# Altium PCB 主控板0415 .PcbDoc (part 3 of 3)
Units mil, origin at the board's own origin, x right, y up, seen from the top; angles counter-clockwise.
Board outline 9048 x 3931 mil, 2 copper layers (Top Layer, Bottom Layer); 421 components, 239 nets, 1182 pads, 360 vias.
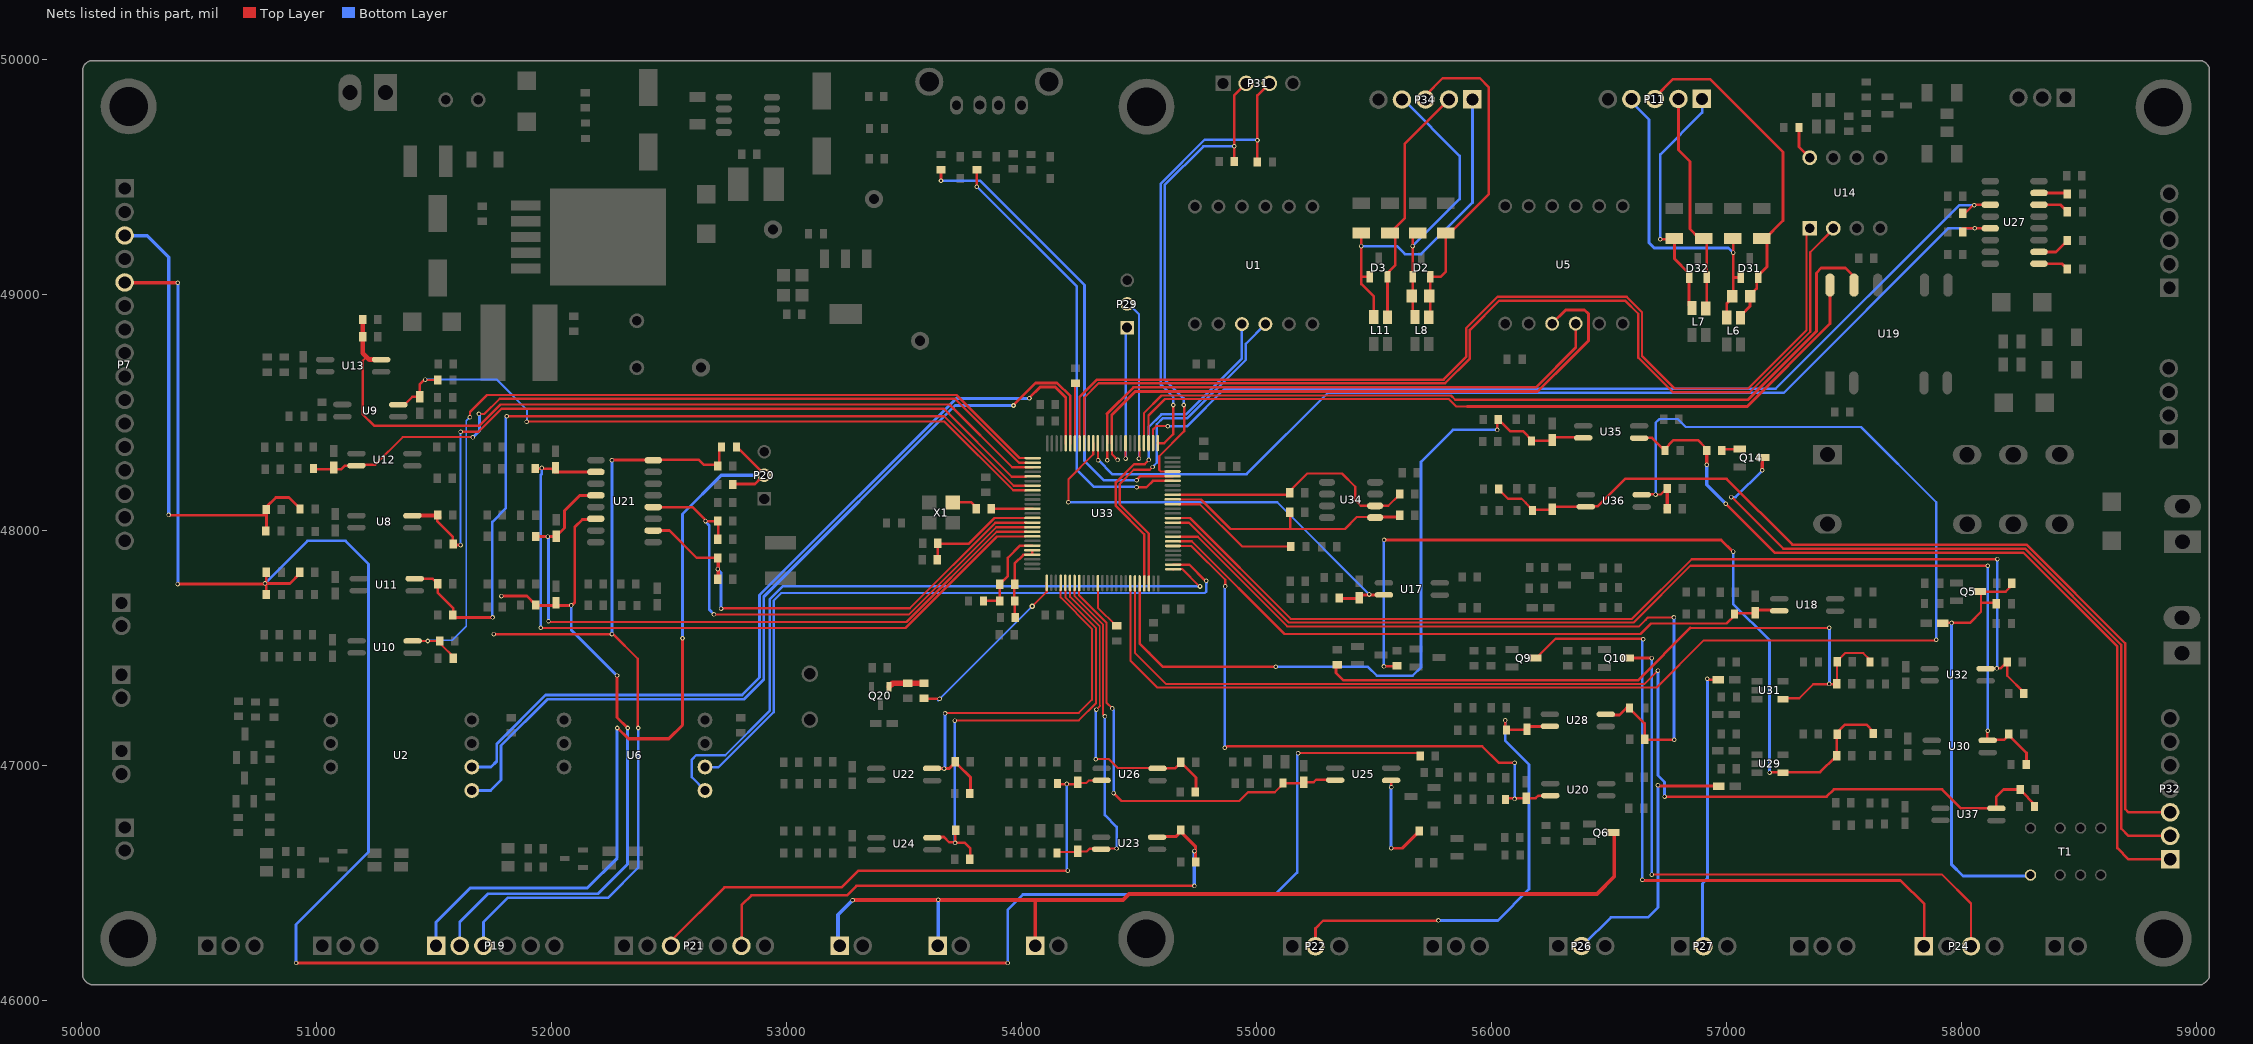
[diagram p3: the nets of this part, all layers, seen from the top]

## Via types
v1: diameter 19, hole 11.81, Top Layer to Bottom Layer, 133 vias
v2: diameter 19, hole 12, Top Layer to Bottom Layer, 130 vias
v3: diameter 20, hole 10, Top Layer to Bottom Layer, 67 vias
v4: diameter 24, hole 12, Top Layer to Bottom Layer, 29 vias
v5: diameter 40, hole 20, Top Layer to Bottom Layer, 1 vias

## Nets (pads, with @x,y where several pads share a name; then routed paths per layer and width w, separated by ;. In a path a pad name is that pad's centre, name@x,y a point inside that pad or via, vN(x,y) a via of type N, cw(c..) or ccw(c..) an arc to the next point about the centre after c; other vN are vias at no path point) (continued)
NetQ14_1: Q14.1 R201.1 | length 78.5
  Top Layer w10.94: R201.1@56980,48338 56986,48344 Q14.1@57056,48344
NetQ20_1: Q20.1 R194.1 R195.1 | length 154.8
  Top Layer w23.94: Q20.1@53437.4,47332.99 53452.41,47348 R194.1@53516,47348 R195.1@53586,47348
NetR2_2: R2.2 X1.3 | length 108.8
  Top Layer w10.94: X1.3@53708,48117.31 53786.69,48117.31 R2.2@53808,48096
NetR58_1: R58.1 U14.8 | length 147.1
  Top Layer w12: R58.1@57308,49712 57308,49630 U14.8@57354,49584
NetR137_2: R137.2 U25.3 | length 420.7
  Top Layer w10.94: v1(55574,46906) U25.3@55574,46926
  Top Layer w11.94: v1@55576,46646 55620,46646 R137.2@55682,46708
  Bottom Layer w12.36: v1(55573,46647) 55573,46916
NetR147_2: R147.2 U27.15 | length 122.6
  Top Layer w12: U27.15@58329,49433.86 58446.14,49433.86 R147.2@58450,49430
NetR149_2: R149.2 U27.14 | length 133.3
  Top Layer w12: U27.14@58329,49383.71 58420.29,49383.71 R149.2@58450,49354
NetR153_2: R153.2 U27.10 | length 141.2
  Top Layer w12: U27.10@58329,49183.14 58401.14,49183.14 R153.2@58450,49232
NetR154_2: R154.2 U27.9 | length 130.5
  Top Layer w12: U27.9@58329,49133 58427,49133 R154.2@58450,49110
NetR163_2: R163.2 R166.2 R167.2 R170.2 U29.4 | length 3646.1
  Top Layer w9.94: v2@55544,47420 R163.2@55582,47420
  Top Layer w10.94: v2@57186,46969 U29.4@57227,46969 ; U29.4@57250,46970 57398,46970 R170.2@57463,47035 ; R170.2@57469,47039 57469,47138 57503,47172 57595,47172 57621,47146 R167.2@57621,47145
  Top Layer w11.94: v1@55546,47957 56380,47957 ; 56386,47957 56380,47957 ; v1@57026,47908 56977,47957 56380,47957
  Bottom Layer w11.36: v2@55542,47418 v1@55542,47957
  Bottom Layer w11.94: v1(57028,47908) 57028,47686 57182,47532 57182,46971 v2@57185,46968
  other v1: 55543,47958
  other v2: 57183,46968 55542,47420
NetR164_2: R164.2 R172.2 R173.2 R176.2 U31.4 | length 2959.3
  Top Layer w8.94: R176.2@57470,47359 57470,47442 57504,47476 57582,47476 57609,47449 R172.2@57609,47448
  Top Layer w9.94: 56845,47583 v1@57436,47583 ; U31.4@57255,47284 57309,47284 57369,47344 R176.2@57459,47344
  Top Layer w11.94: R164.2@55354,47416 55338,47416 55338,47392 55369.49,47360.51 56622.51,47360.51 56845,47583
  Bottom Layer w12.36: v1(57437,47345) v1(57437,47584)
NetR179_1: R179.1 U33.94 | length 221
  Top Layer w9.36: U33.94@54228,48397 R179.1@54228,48618
NetR181_1: R181.1 U33.37 | length 185.3
  Top Layer w8.36: U33.37@54325,47745 54325,47670 R181.1@54403,47592
NRST: C83.2 R182.1 U33.14 | length 498
  Top Layer w10.36: R182.1@53636,47942 53776.98,47942 53885.98,48051 U33.14@54018,48051 ; C83.2@53642,47874 53644,47876 R182.1@53644,47944
OFF: P7.5 R39.2 R42.2 R47.2 R143.2 | length 10064.5
  Top Layer w8.94: v1@55176,47051 R143.2@55684,47051
  Top Layer w11.94: v2(50410,47770) v2@50780,47770 ; R42.2@50780,47820 50787,47813 R47.2@50787,47732 ; v2@50787,47773 50888,47773 R39.2@50929,47814 ; v2(50914,46158) v1@53940,46158
  Top Layer w12.94: P7.5@50193,49052 v1(50411,49052)
  Bottom Layer w11.36: v1(53942,46158) 53942,46385 54006,46449 55079,46449 55173,46543 v1@55173,47053
  Bottom Layer w11.94: v2(50782,47773) 50963,47954 51124,47954 51222,47856 51222,46630 50914,46322 v2(50914,46158)
  Bottom Layer w12.36: v2@50411,47774 v1(50411,49052)
  other v1: 55177,47050
ON/EXP: P7.3 R27.2 R31.2 R36.2 | length 1992.2
  Top Layer w11.94: v1@50372,48063 50780,48063 ; R36.2@50789,48004 R31.2@50789,48094 ; R31.2@50789,48068 50789,48099 50828,48138 50884,48138 R27.2@50926,48096
  Bottom Layer w15.36: P7.3@50209,49252 50281,49252 50372,49161 v1@50372,48069
  other v1: 50372,48064
ORIGIN: D85.2 D86.2 P22.2 U28.2 | length 2014.2
  Top Layer w10.94: P22.2@55251,46246 55251,46305 55284,46338 v1@55776,46338
  Top Layer w11.94: v2(56058,47190) 56058,47151 56059,47150 56141,47150 56155,47164 U28.2@56228,47164
  Bottom Layer w11.94: v1(55774,46339) 56027,46339 56160,46472 56160,47002 56058,47104 v2(56058,47190)
"P14 24 M": C50.2 D56.1 Q5.3 R95.2 T1.8 | length 1827.5
  Top Layer w9.94: D56.1@57926,47605 58035,47605 58082,47652 Q5.3@58082,47740 ; 58085,47691 R95.2@58139,47691 ; Q5.3@58094,47738 58188,47738 C50.2@58218,47768
  Bottom Layer w12.36: v2(57957,47605) 57956.01,46578.07 58005.72,46528.27 T1.8@58282,46528
"P16 P17 P18": P16.1 P17.1 P18.1 Q6.3 | length 4023
  Top Layer w14.94: P18.1@54058,46265 54058,46422
  Top Layer w16.36: v2(53282,46425) 53283,46426 54432,46426 54458,46452 56448,46452 56522,46526 56522,46708 Q6.3@56516,46714
  Bottom Layer w16.36: P16.1@53220,46246 53220,46363 v2(53282,46425) ; P17.1@53646,46238 v1(53646,46427)
PA3(BZ): R195.2 U33.26 | length 740.1
  Top Layer w10: R195.2@53596,47282 v2@53648,47282 ; v4@54048,47678 54107.45,47737.45 U33.26@54107.45,47775.79
  Bottom Layer w10: v2@53646,47276 v4(54046,47676)
  other v2: 53652,47282
PA4(KV85): C56.2 R123.2 U22.4 U33.29 | length 1620.7
  Top Layer w8.36: v2@53677,47222 54244.31,47222 54300,47277.69 54300,47580 54167,47713 U33.29@54167,47748
  Top Layer w11.94: U22.4@53648,46986 53693,46986 R123.2@53713,47006 ; R123.2@53727,47001 53730,47001 53783,46948 C56.2@53783,46881
  Bottom Layer w11.36: v2@53675,46989 v2(53675,47220)
  other v2: 53671,46985
PA5(FAULT): C58.2 R130.2 U24.4 U33.30 | length 1937.4
  Top Layer w8.36: v2@53713,47190 54244,47190 54318,47264 54318,47583 54187,47714 U33.30@54187,47745
  Top Layer w10.94: U24.4@53642,46694 53670,46694 53693,46671 v1@53718,46671 ; v1(53718,46669) 53759,46669 53783,46645 C58.2@53783,46597 ; v1@53718,46675 R130.2@53718,46710
  Bottom Layer w11.36: v1@53716,46666 v2(53716,47189)
PA6(READY): C59.2 R139.2 U26.4 U33.31 | length 1263.4
  Top Layer w8.36: U33.31@54207,47747 54207,47716 54333.28,47589.72 54333.28,47253.1 54333.64,47252.74 54333.64,47250.64 v1(54319,47236)
  Top Layer w8.94: v2@54317,47026 54372,47026 54411,46987 U26.4@54557,46987
  Top Layer w10.94: U26.4@54594,46986 54653,46986 R139.2@54677,47010
  Top Layer w11.94: R139.2@54688,47002 54743,46947 C59.2@54743,46893
  Bottom Layer w10.36: v2(54316,47025) v1@54316,47238
PA7(PRE): D75.2 D77.2 U23.2 U33.32 | length 1361.1
  Top Layer w8.36: U33.32@54226,47749 54226,47719 54347.64,47597.36 54347.64,47259.05 54348,47258.69 54348,47214 v1(54355,47207)
  Top Layer w9.94: D77.2@54166,46630 D75.2@54227,46630 ; D75.2@54232,46632 54278,46632 54290,46644 U23.2@54309,46644
  Top Layer w10: U23.2@54365,46645 v1(54405,46645)
  Bottom Layer w10.36: v1(54355,47207) 54355,46787 54405,46737 v1(54405,46645)
PA8(SCL): C90.1 R190.2 U33.67 U34.6 | length 1082.2
  Top Layer w9.36: U33.67@54673,48150 C90.1@55146,48150 ; C90.1@55142,48158 55142,48166 55216,48240 55364,48240 55420,48184 55420,48126 55443,48103 55561,48103 R190.2@55604,48146
"PA11(USB D-)": R187.1 U33.70 | length 1905.6
  Top Layer w10.36: v3(53810,49460) 53810,49532.5 R187.1@53811,49533.5 ; v2(54490,48182) 54532,48182 54559.25,48209.25 U33.70@54643.32,48209.25
  Bottom Layer w10.36: v3@53810,49462 54236,49036 54236,48256 54308.82,48183.18 54488.82,48183.18 v2(54490,48182)
"PA12(USB D+)": R188.1 U33.71 | length 2003.6
  Top Layer w11.36: v3(53658,49486) R188.1@53658,49533.5 ; v2(54490,48212) 54507.05,48229.05 U33.71@54643.2,48229.05
  Bottom Layer w11.36: v3@53654,49486 53824,49486 54268,49042 54268,48294 54350,48212 v2@54484,48212
PA13(SWDIO): P31.2 R192.2 U33.72 | length 2064.3
  Top Layer w10: U33.72@54643.08,48248.85 54593.15,48248.85 54586,48256 54586,48314 54692,48420 v3@54692,48526
  Top Layer w10.94: R192.2@54906,49568 54906,49850 P31.2@54956,49900
  Bottom Layer w10: v3@54690,48528 54690,48560 54609.31,48640.69 54609.31,49467.31 54774,49632 v3(54906,49632)
  other v3: 54690,48532
PA14(SWCLK): P31.3 R193.2 U33.76 | length 2006.7
  Top Layer w10: U33.76@54579.79,48369.76 54607.76,48369.76 54646,48408 v3@54646,48528
  Top Layer w10.94: R193.2@55004,49566 55004,49849 P31.3@55055,49900
  Bottom Layer w10: v3(54646,48532) 54646,48566 54593.31,48618.69 54593.31,49473.94 54779.37,49660 v3@55002,49660
  other v3: 55004,49658
PA15(EA): R162.1 U27.3 U33.77 | length 4055.1
  Top Layer w9.36: U33.77@54560,48398 54560,48428 54574,48442 v3(54622,48442) ; R162.1@58005,49338 58050.71,49383.71 U27.3@58122,49383.71
  Bottom Layer w10.94: v3(54622,48442) 54706,48442 54864.94,48600.94 57208.94,48600.94 57990,49382 v3(58054,49382)
PB3(EB): R156.1 U27.5 U33.89 | length 4368.1
  Top Layer w9.36: v2(54326,48297) U33.89@54326,48341 ; R156.1@58005,49264 58005,49283.43 U27.5@58122,49283.43
  Bottom Layer w10.94: v2(54326,48297) 54327,48297 54386,48238 54958,48238 55304,48584 57244,48584 57944,49284 v3(58056,49284)
PB4(24_M): D40.2 D41.2 U17.2 U33.90 | length 1926.1
  Top Layer w10: v2(54200,48118) 54200,48216 54305.91,48321.91 U33.90@54305.91,48368.94
  Top Layer w11.94: D41.2@55355,47709 D40.2@55435,47709
  Top Layer w12: D40.2@55438,47712 55450,47724 U17.2@55542,47724
  Bottom Layer w10: v2(54200,48118) 55088,48118 v3(55480,47726)
"PB5(485 ENABLE)": U33.91
PB6(485_TX): U14.2 U33.92 | length 4345.7
  Top Layer w9.36: U33.92@54267,48395 54267,48527
  Top Layer w10: 54267,48527 54267,48563 54328,48624 55802.63,48624 55908,48729.37 55908,48851.37 56032.63,48976 56568,48976 56624,48920 56624,48733.37 56771.37,48586 57098.63,48586 57356,48843.37 57356,49182 U14.2@57448,49274
PB7(485_RX): U14.1 U33.93 | length 4304.8
  Top Layer w9.36: U33.93@54247,48394 54247,48530
  Top Layer w10: 54247,48530 54247,48565.63 54321.37,48640 55796,48640 55892,48736 55892,48858 56026,48992 56574.63,48992 56640,48926.63 56640,48740 56778,48602 57092,48602 57340,48850 57340,49260 U14.1@57346,49266
"PB8(CAN1 RX)": U2.4 U33.95 | length 3777.4
  Top Layer w12: v3@53966,48532 54060,48626 54151.46,48626 54208.09,48569.36 U33.95@54208.09,48368.64
  Bottom Layer w12: U2.4@51662,46892 51742,46892 51786,46936 51786,47082.54 51983.46,47280 52819.46,47280 52904,47364.54 52904,47716 53718,48530 v3@53964,48530
  other v3: 53966,48530
"PB9(CAN1 TX)": U2.3 U33.96 | length 3655
  Top Layer w12: v3@54031,48561 54033,48561 54080,48608 54144,48608 54188.53,48563.47 U33.96@54188.53,48368.58
  Bottom Layer w12: U2.3@51662,46992 51744,46992 51768,47016 51768,47090 51976,47298 52812,47298 52886,47372 52886,47723.46 53722.54,48560 v3@54028,48560
  other v3: 54034,48560
PB12(CAN2_RX): U6.4 U33.51 | length 3045
  Top Layer w10: U33.51@54645.56,47833.07 54646.49,47834 54684,47834 v3@54759,47759
  Bottom Layer w10: U6.4@52654,46892 52598,46948 52598,47024 52616,47042 52714,47042 52740,47042 52930,47232 52930,47706.63 52983.37,47760 v3(54760,47760)
PB13(CAN2_TX): U6.3 U33.52 | length 2932
  Top Layer w10: U33.52@54645.44,47852.87 54713.76,47852.87 v3@54783.31,47783.31
  Bottom Layer w10: U6.3@52662,46978 52674,46990 52710.63,46990 52946,47225.37 52946,47700 52978,47732 54780,47732 54787,47739 54787,47774.7 54788,47775.7 54788,47780 v3@54784,47784
  other v3: 54786,47784
PC0(FLOOUT): C55.2 R119.2 U21.10 U33.15 | length 2010.4
  Top Layer w10.36: v1@52723,47667 53525.12,47667 53889.12,48031 U33.15@54021,48031
  Top Layer w10.94: U21.10@52433.14,47997.86 52502.14,47997.86 52618,47882 R119.2@52713,47882
  Top Layer w15.94: 52710,47810 R119.2@52710,47872
  Bottom Layer w12.36: v2@52708,47832 52722,47818 v1(52722,47666)
  other v2: 52708,47834
PC1(RADOUT): C54.2 R115.2 U21.12 U33.16 | length 2250.8
  Top Layer w9.36: v1@52695,47640 53520.55,47640 53892.55,48012 U33.16@54018,48012
  Top Layer w10.94: U21.12@52435,48097 52601,48097 52654,48044 v2@52654,48038 ; v2(52656,48038) R115.2@52708.68,48038 ; C54.2@52710,47963 R115.2@52710,48030
  Bottom Layer w11.36: v2@52658,48034 52672,48020 52672,47661 v1(52692,47641)
PC2(FLOSY): D68.2 D69.2 U21.4 U33.17 | length 2905.6
  Top Layer w9.36: v2@51989,47609 53511.27,47609 53895.27,47993 U33.17@54021,47993
  Top Layer w11.94: D68.2@51934,47972 52019,47972 52056,48009 52056,48082 52121,48147 U21.4@52172,48147
  Bottom Layer w11.36: v2(51985,47972) 51988,47969 v2(51988,47612)
PC3(RADSY): D66.2 D67.2 U21.2 U33.18 | length 3137.6
  Top Layer w9.36: v2@51956,47583 53507,47583 53896,47972 U33.18@54016,47972
  Top Layer w11.94: D66.2@51936,48261 52001,48261 52015,48247 U21.2@52165,48247
  Bottom Layer w11.36: v2(51955,47584) 51955,48234 51959,48238 v2(51959,48264)
PC4(EXPOSE): D80.2 D82.2 U25.2 U33.33 | length 1906.3
  Top Layer w8.36: U33.33@54245,47747 54245,47723 54362,47606 54362,47265 v1(54386,47241)
  Top Layer w9.94: v1(54392,46881) 54426,46847 54927,46847 54964,46884 55078,46884 55117,46923 D80.2@55204,46923 ; D80.2@55206,46927 55243,46927 55254,46938 U25.2@55320,46938
  Bottom Layer w10.36: v1@54383,47243 54392,47234 v1(54392,46881)
PC9(SDA): C91.1 R189.2 U33.66 U34.5 | length 1059.8
  Top Layer w9.36: U33.66@54672,48130 54764,48130 54889.36,48004.64 55376.64,48004.64 55427,48055 U34.5@55503,48055 ; 55144,48005 C91.1@55144,48070
  Top Layer w11.94: U34.5@55514,48056 R189.2@55605,48056
PC10(TX): U19.9 U33.78 | length 3304.3
  Top Layer w9.36: U33.78@54541,48399 54541,48487 54610.96,48556.96 55817.67,48556.96 55848.63,48526 55895,48526
  Top Layer w12: 55895,48526 57088.12,48526 57440,48877.88 57440,49002 U19.9@57436,49006
PC11(RX): U19.8 U33.79 | length 3585.3
  Top Layer w9.36: U33.79@54521,48400 54521,48497 54596.32,48572.32 55827.68,48572.32 55846,48554 55941,48554
  Top Layer w12: 55941,48554 57090.67,48554 57382,48845.33 57382,49094 57402,49114 57506,49114 57542,49078 U19.8@57542,49042
PC12(TX): P29.2 U33.80 | length 716.3
  Top Layer w9.36: v2@54502,48302 U33.80@54502,48347
  Bottom Layer w9.36: P29.2@54463,48955 54500,48918 v2@54500,48299
  other v2: 54500,48304
PC13(OFF): C32.2 R41.2 U11.4 U33.7 | length 3621.7
  Top Layer w9.36: 53671.73,48484 53967.73,48188 U33.7@54020,48188
  Top Layer w9.94: U11.4@51419,47793 51495,47793 R41.2@51517,47771 ; v1@51806,48484 53671.73,48484
  Top Layer w10.94: R41.2@51516,47760 51516,47734 51582,47668 C32.2@51582,47639
  Top Layer w11.94: C32.2@51588,47628 v2@51748,47628
  Bottom Layer w11.36: v2@51749,47636 51749,48035 51806,48092 v1@51806,48482
  other v1: 51810,48484
  other v2: 51750,47628
PC14(FAULT1): D20.2 D180.2 U9.2 U33.8 | length 3014.3
  Top Layer w9.36: v1(51895,48461) 51896,48462 53672,48462 53965,48169 U33.8@54018,48169
  Top Layer w10: U9.2@51349,48533 51375,48533 51409,48567 D180.2@51441,48567 51441,48621 51458,48638 D20.2@51517,48638
  Bottom Layer w9.36: 51474,48640 51768,48640 51896,48512 51896,48462 v1(51895,48461)
  other v1: 51464,48640
PC_RX+: D15.1 D32.2 L7.4 P11.2 | length 953.6
  Top Layer w12: P11.2@56795,49833.75 56795,49617 56844,49568 56844,49280 56883,49241 D15.1@56902,49241 56915.4,49227.61 D32.2@56915.4,49074.63 56915.4,48947.4 L7.4@56911,48943
PC_RX+2: D3.2 D7.1 L11.4 P34.2 | length 1053.5
  Top Layer w10.94: L11.4@55557,48905 55557.4,48905.4 D3.2@55557.4,49076.63 55557.4,49093.4 55590,49126 55590,49242 D7.1@55568,49264 55630,49326 55630,49642.75 P34.2@55819,49831.75
PC_RX-: D29.1 D32.1 L7.3 P11.1 | length 1027.2
  Top Layer w10.94: v2(56718,49237) D29.1@56746,49237
  Top Layer w12: D29.1@56778,49241 56778,49154 56840.6,49091.4 56840.6,48956.4 L7.3@56853,48944
  Bottom Layer w10.94: v2(56718,49237) 56718,49598 56896,49776 56896,49833 P11.1@56895,49834
PC_RX-2: D3.1 D11.1 L11.3 P34.1 | length 1425.6
  Top Layer w10.94: 55446,49076 55446.63,49076.63 D3.1@55482.6,49076.63 ; D11.1@55446,49264 55446,49046 55499,48993 L11.3@55499,48906
  Bottom Layer w10.94: v2@55454,49208 55598,49208 55632,49174 55700,49174 55919,49393 P34.1@55919,49832
  other v2: 55446,49208
PC_TX+: D31.1 D33.1 L6.3 P11.4 R82.2 | length 1402.5
  Top Layer w12: L6.3@57001,48904 57001,48965 57036,49000 57028.6,49007.4 57028.6,49074.63 ; D33.1@57026,49241 57028.6,49238.4 57028.6,49074.63 ; D31.1@57060.6,49074.63 57028.6,49074.63
  Bottom Layer w12: P11.4@56595,49833.25 56595,49821 56670,49746 56670,49222 56692,49200 57008,49200 v2@57026,49182
  other v2: 57028,49180
PC_TX+2: D2.1 D12.1 L8.3 P34.4 R81.1 | length 1181.9
  Top Layer w10.94: L8.3@55674.41,48906 55664.6,48915.81 D2.1@55664.6,49076.63 55664.6,49242.6 D12.1@55686,49264
  Bottom Layer w10.94: P34.4@55619,49831.25 55624.75,49831.25 55864,49592 55864,49408 v2(55664,49208)
PC_TX-: D31.2 D34.1 L6.4 P11.3 R82.1 | length 1479.5
  Top Layer w12: P11.3@56695,49833.5 56695,49841 56772,49918 56930,49918 57240,49608 57240,49316 57159,49235 57172,49222.01 57172,49120 D31.2@57136,49084 ; L6.4@57059,48903 57059,48911 57100,48952 57100,49000 57128,49028 D31.2@57128,49063.26
PC_TX-2: D2.2 D14.1 L8.4 P34.3 R81.2 | length 1442.7
  Top Layer w10.94: P34.3@55719,49831.5 55719,49849 55792,49922 55950,49922 55988,49884 55988,49428 55806,49246 55806,49100 55782.63,49076.63 D2.2@55739.4,49076.63 55739.4,48911.99 L8.4@55732.41,48905
PD2(RX): P29.1 U33.83 | length 610.3
  Top Layer w9.36: v2@54443,48303 U33.83@54443,48348
  Bottom Layer w9.36: v2@54443,48307.82 v2@54444,48308.82 ; v2@54444,48302 54444,48839 P29.1@54463,48858
  other v2: 54443,48304
PD5(422-TX): U5.3 U33.86 | length 2643.6
  Top Layer w9.36: U33.86@54385,48348 54385,48322 v2(54409,48298)
  Top Layer w10: U33.86@54384.16,48369.17 54384.16,48488.71
  Top Layer w12: 54384.16,48488.71 54484.46,48589 56195.91,48589 56341.46,48734.54 ; U5.3@56258,48878 56316,48936 56396,48936 56412,48920 56412,48805.09 56341.46,48734.54 ; 56345.46,48738.54 56341.46,48734.54
PD6(422-RX): U5.4 U33.87 | length 2359.1
  Top Layer w9.36: v2@54365,48295 U33.87@54365,48341
  Top Layer w10: U33.87@54364.6,48369.11 54364.6,48494.6
  Top Layer w12: 54364.6,48494.6 54477,48607 56188.46,48607 56358,48776.54 U5.4@56358,48854
  other v2: 54365,48297
PD9(P16,P17,P18): D64.2 D65.2 U20.2 U33.56 | length 2543.3
  Top Layer w9.36: U33.56@54675,47932 54723,47932 54867,47788 v1(54867,47760)
  Top Layer w10.94: v1@54870,47074 54876,47080 55960,47080 56030,47010 v2(56098,47010) ; D65.2@56067,46859 56188,46859 56198,46869 U20.2@56228,46869
  Bottom Layer w10.36: v2@56098,46859 v2(56098,47010)
  Bottom Layer w11.36: v1(54865,47074) v1@54865,47762
  other v2: 56098,46856
PD10(P14): D54.2 D57.2 U18.2 U33.57 | length 2710
  Top Layer w9.36: U33.57@54674,47952 54725,47952 55119,47558 56634,47558 56678,47602 57000,47602 D57.2@57040,47642
  Top Layer w11.94: D57.2@57046,47646 D54.2@57115,47646 ; D54.2@57122,47660 U18.2@57199,47660
PD11(ORIGIN): C61.2 R150.2 U28.4 U33.58 | length 3161.3
  Top Layer w9.36: U33.58@54674,47971 54750,47971 55131,47590 56628,47590 56656,47618 56666,47628 v1(56776,47628)
  Top Layer w10.94: U28.4@56505,47213 56544,47213 56574,47243 56585,47243 56651,47177 C61.2@56651,47115 ; C61.2@56658,47108 v2(56777,47108)
  Bottom Layer w13.36: v2(56777,47108) v1@56777,47627
PD14(FOREWARD): C63.2 R169.2 U30.4 U33.61 | length 4686.5
  Top Layer w9.36: U33.61@54674,48031 54713,48031 55138,47606 56604,47606 56846,47848 v2(58111,47848)
  Top Layer w10.94: U30.4@58109,47114 v1@58109,47144 ; U30.4@58116,47107 58180,47107 58195,47122 58206,47122 58276,47052 C63.2@58276,47008
  Bottom Layer w10.36: v1(58111,47146) v2@58111,47850
PD15(REVERSE): C65.2 R175.2 U32.4 U33.62 | length 4448.4
  Top Layer w9.36: U33.62@54674,48051 54717,48051 55146,47622 56598,47622 56852,47876 v2(58152,47876)
  Top Layer w10.94: U32.4@58131,47411 58165,47411 58187,47433 R175.2@58187,47434 ; R175.2@58194,47434 58194,47380 C65.2@58265,47309
  Bottom Layer w10.36: v2@58152,47409 v2(58152,47876)
  other v2: 58149,47411
PE2(EMC-): C31.2 R33.2 U10.4 U33.1 | length 3806.6
  Top Layer w9.36: v1@51656,48482 51654,48484 51654,48502 51726,48574 53723.73,48574 53991.73,48306 U33.1@54023,48306
  Top Layer w9.94: U10.4@51410,47528 R33.2@51517,47528 ; R33.2@51530,47514 C31.2@51587,47457
  Bottom Layer w6.36: v3@51474,47530 51578,47530 51639,47591 51639,48465 v1@51656,48482
  other v1: 51654,48480
  other v3: 51474,47528
PE3(BELL): D23.2 D26.2 U12.2 U33.2 | length 3239.6
  Top Layer w8.94: 51250,48277 51368,48395 v1@51666,48395
  Top Layer w9.36: v1@51696,48494 51716,48494 51780.64,48558.64 53717.36,48558.64 53990,48286 U33.2@54023,48286
  Top Layer w10.94: D26.2@51003,48259 51107,48259 51122,48274 U12.2@51154,48274 ; 51210,48277 51250,48277
  Bottom Layer w12.36: v1@51664,48396 51668,48396 51694,48422 v1@51694,48492
  other v1: 51666,48394 51692,48494
PE4(PRE): C34.1 R46.1 U13.4 U33.3 | length 3501.5
  Top Layer w10: 51214,48736 51198,48720 51198,48492 51246,48444 51694,48444 51784,48534 53694,48534 53961.06,48266.94 U33.3@54047.87,48266.94
  Top Layer w20: R46.1@51198,48896 51198,48752 51225,48725 U13.4@51276,48725
PE6(EXP): C29.2 R30.2 U8.4 U33.5 | length 3350
  Top Layer w9.36: v1(51614,48418) 51690,48418 51700.32,48428.32 51700.5,48428.32 51787.83,48515.65 53670.35,48515.65 53959,48227 U33.5@54020,48227
  Top Layer w10.94: R30.2@51527,48055 51514,48055 51514,48038 51581,47971 C29.2@51581,47929
  Top Layer w11.94: C29.2@51589,47936 v1(51614,47936)
  Top Layer w16.94: U8.4@51409,48061 51514,48061 R30.2@51517,48064
  Bottom Layer w9.36: v1@51614,47935 v1(51614,48418)
"PE13(SYNC OUT)": C93.2 R203.2 U33.44 U36.4 | length 6255.2
  Top Layer w8.36: U33.44@54464,47747 54464,47444 54578,47330 56702,47330 56901,47529 v2@57892,47529
  Top Layer w10: v2@56702,48151 56720,48151 R203.2@56739,48170
  Top Layer w10.94: U36.4@56674,48152 v2@56699,48152
  Top Layer w15: C93.2@56747,48091 R203.2@56747,48177
  Top Layer w30: C93.2@56747,48091 C93.2@56748,48090
  Bottom Layer w10: v2(56698,48151) 56698,48456 56714,48472 56792,48472 56826,48438 57572,48438 57892,48118
  Bottom Layer w12.36: v2(57892,47533) 57892,48118
PE14(FDP_ENABLE): C94.2 R207.2 U33.45 U37.4 | length 4861.6
  Top Layer w8.36: U33.45@54484,47748 54484,47476 54615.64,47344.36 56650.36,47344.36 56710,47404 v2@56710,47406
  Top Layer w10.94: v2(56736,46866) 57426,46866 57457,46897 57917,46897 57998,46816 U37.4@58172,46816 ; U37.4@58148,46816 58148,46866 58178,46896 R207.2@58249,46896 ; R207.2@58249,46893 58250,46893 C94.2@58315,46828
  Bottom Layer w11.36: v2@56708,47398 56708,46956 56736,46928 v2(56736,46866)
  other v2: 56708,47402
PE15(SYNC_IN): D102.2 D103.2 R198.1 U33.46 U35.2 | length 3181
  Top Layer w10.94: U33.46@54502.84,47772.85 54502.84,47517.16 54543,47477 ; 54536,47484 54602,47418 v1@55080,47418 ; v2@56024,48430 R198.1@56024,48464 ; R198.1@56036,48467 56036,48464 56079,48421 56133,48421 56175,48379 56242,48379 ; D102.2@56264,48394 U35.2@56382,48394
  Bottom Layer w10.94: v1@55084,47418 55474,47418 55512,47380 55664,47380 55700,47416 55700,48290 55836,48426 v2(56024,48426)
  other v1: 55082,47418
PRE: C57.2 P21.6 R125.2 U23.4 | length 2477.3
  Top Layer w10.94: P21.6@52811,46256 52811,46406 52851,46446 53258,46446 53298,46486 v2@54733,46486
  Top Layer w13.94: U23.4@54610,46696 54656,46696 54678,46718 54678,46716 54741,46653 C57.2@54741,46597
  Bottom Layer w15.36: v2(54736,46486) v1(54736,46634)
RADOUT: D17.2 D70.2 P19.2 U21.6 | length 2849.1
  Top Layer w11.94: v2(51788,47719) 51896,47719 51936,47679 52087,47679 52100,47692 52100,48013 52132,48045 U21.6@52168,48045 ; v2(52280,47381) 52280,47203 v3(52325,47158)
  Bottom Layer w11.94: v2(52085,47679) 52085,47575 v2@52278,47382
  Bottom Layer w12: P19.2@51610.6,46231 51610.6,46332 51730.96,46452.36 52198.36,46452.36 52324,46578 v3@52324,47156
RADSY: C52.2 P19.3 R105.2 U21.16 | length 3655.7
  Top Layer w9.94: v2@51761,47556 v2@52256,47556 ; v2(52258,47557) 52263,47557 52368,47452 52368,47160 v3(52370,47158)
  Top Layer w10.36: U21.16@52464,48298 52617,48298 52628,48298 52648,48278 52702.68,48278 C52.2@52708.68,48272 ; C52.2@52714,48264 R105.2@52714,48346
  Top Layer w11.94: v2@52258,48298 U21.16@52448,48298
  Bottom Layer w10.36: 51711.2,46332 51814.38,46435.18 52241.18,46435.18 52370,46564 v3@52370,47156
  Bottom Layer w12: P19.3@51711.2,46231 51711.2,46332
  Bottom Layer w13.36: v2@52258,47559 v2@52258,48296
  other v2: 51755,47557 52258,48297
READY: D83.2 D84.2 P21.3 U26.2 | length 2336.5
  Top Layer w8.94: D83.2@54242,46923 54275,46923 54286,46934 U26.2@54324,46934
  Top Layer w10.94: P21.3@52515,46246 52515,46259 52736,46480 53235,46480 53306,46551 v1@54198,46551 ; D84.2@54163,46919 D83.2@54228,46919
  Bottom Layer w11.36: v1@54193,46552 v2(54193,46920)
  other v1: 54197,46551
REVERSE: D93.1 P27.2 | length 1179.9
  Top Layer w11.94: v2(56918,47367) 56922,47363 D93.1@56964,47363
  Bottom Layer w12.36: P27.2@56898,46243 56898,46496 56918,46516 v2(56918,47367)
RUNLED: D98.2 U33.65 | length 545.6
  Top Layer w9.36: U33.65@54670,48110 54759,48110 54939,47930 D98.2@55141,47930
SF1+: P24.1 Q9.3 | length 2902
  Top Layer w9.94: Q9.3@56192,47457 56272,47537 v1@56643,47537
  Top Layer w10.94: Q9.3@56192,47455 Q9.3@56192,47457 ; v1@56642,46509 57740,46509 57841,46408 P24.1@57841,46255
  Bottom Layer w11.36: v1@56641,46514 v1@56641,47536
  other v1: 56642,46512 56645,47535
SF2+: P24.3 Q10.3 | length 2597.9
  Top Layer w8.94: v1@56684,46534 57917,46534 58040,46411 P24.3@58040,46222
  Top Layer w11.94: Q10.3@56598,47455 v1(56682,47455)
  Bottom Layer w11.36: v1@56682,46537 v1(56682,47455)
  other v1: 56682,46534
"SYNC OUT": D104.2 D105.2 P32.3 R204.1 U36.2 | length 3892.5
  Top Layer w8.94: R204.1@56039,48164 56070,48133 56128,48133 56145,48116
  Top Layer w10.94: 56145,48116 56175,48086 D104.2@56246,48086 ; D104.2@56262,48099 U36.2@56391,48099 ; U36.2@56412,48101 56451,48101 56568,48218 57000,48218 57280.13,47937.87 58276.13,47937.87 58696,47518 58696,46813 58710,46799 P32.3@58887,46799
SYNC_IN_N: P32.2 Q14.3 | length 3150.8
  Top Layer w10.94: v1@57024.02,48138.02 57241.11,47920.94 58269.11,47920.94 58679.06,47510.98 58679.06,46729.94 58710,46699 P32.2@58887,46699
  Top Layer w15: v1(57152,48254) Q14.3@57152,48309
  Bottom Layer w10.94: v1(57020,48140) 57038,48140 v1(57152,48254)
SYNC_IN_P: P32.1 R199.2 R201.2 U35.3 | length 3578
  Top Layer w10.94: U35.3@56649,48392 56683,48392 R199.2@56728,48347 ; R199.2@56735,48342 56735,48343 56774,48382 56878,48382 R201.2@56910,48350 ; R201.2@56921,48348 R201.2@56921,48349 ; v1@56997,48111 57204,47904 58262.1,47904 58662.13,47503.97 58662.13,46646.87 58710,46599 P32.1@58887,46599
  Top Layer w15: v1(56916,48278) 56916,48333 R201.2@56917,48334
  Bottom Layer w15: v1(56916,48278) 56916,48192 v1(56996,48112)
TUBE_BOTT: D90.1 P26.2 | length 1139.4
  Top Layer w10.94: v2@56706,46911 D90.1@56944,46911
  Bottom Layer w11.36: P26.2@56392,46236 56508,46352 56666,46352 56708,46394 v2(56708,46914)
USART3_RX: U1.4 U33.48 | length 1512.9
  Top Layer w10: U33.48@54542.38,47772.55 54542.38,47984.25 54418,48108.63 54418,48196 54478,48256 54546,48256 v2(54558,48268)
  Bottom Layer w10: v2(54558,48268) 54576,48286 54576,48450 54602,48476 54706.63,48476 54954,48723.37 54954,48792 U1.4@55038,48876
USART3_TX: U1.3 U33.47 | length 1462.7
  Top Layer w10: U33.47@54522.61,47772.7 54522.61,47981.39 54402,48102 54402,48202.63 54479.37,48280 54524,48280 v2(54542,48298)
  Bottom Layer w10: v2(54542,48298) 54542,48438.63 54595.37,48492 54700,48492 54938,48730 U1.3@54938,48876
"VCC OUT": P19.1 P20.2 R105.1 R110.1 | length 3482
  Top Layer w12.94: v3(52280,47158) 52282,47158 52328,47112 52500,47112 52558,47170 v3@52558,47542 ; R110.1@52772,48196 52867,48196 P20.2@52898,48227 ; R105.1@52788,48353 52790,48353 52871,48272 52906,48237 P20.2@52906,48233
  Bottom Layer w12.94: P19.1@51510,46231 51510,46332 51654.83,46476.83 52152.83,46476.83 52280,46604 v3@52280,47156 ; v3(52558,47540) 52558,48068 52723,48233 P20.2@52906,48233
VDDA: C76.2 C77.2 L10.2 U33.21 U33.22 | length 350.7
  Top Layer w10.94: C77.2@53970,47688 C76.2@53970,47768 ; C77.2@53971,47698 53971,47630 L10.2@53974,47627 ; C76.2@53971,47769 53971,47857 54008.67,47894.67 U33.22@54046.19,47894.67 54046.19,47914.18 U33.21@54046.28,47914.27
VSSA: C76.1 C77.1 L9.2 U33.20 | length 397.8
  Top Layer w10.94: L9.2@53838,47699 53906,47699 C77.1@53907,47698 C76.1@53907,47769 53942,47804 53942,47882 53993.86,47933.86 U33.20@54046.37,47933.86 ; L9.2@53839,47696 L9.2@53839,47700
XCLKIN: R2.1 U33.12 | length 177.3
  Top Layer w10.94: R2.1@53872,48096 53877.4,48090.6 U33.12@54047.08,48090.6
pads on no net: K1.2 K1.7 P24.4 P30.0 T1.2 T1.7 U1.12 U3.0 U4.2 U4.3 U4.5 U5.12 U19.6 U19.7 U27.11 U27.13 U33.4 U33.9 U33.13 U33.23 U33.24 U33.25 U33.34 U33.35 U33.36 U33.38 U33.39 U33.40 U33.41 U33.42 U33.43 U33.53 U33.54 U33.55 U33.59 U33.60 U33.63 U33.64 U33.68 U33.69 U33.81 U33.82 U33.84 U33.85 U33.88 U33.97 U33.98

## Polygon pours and split planes (outlines as drawn)
GND_422_1 on Top Layer "BOTTOM-No Net" (solid, remove dead copper, pour order 1002): 56268,49950 56270,49948 56706,49948 56940,49948 57010,49878 57208,49680 57208,49348 57208,49196 57146,49134 57136,49124 56986,49124 56288,49124 56132,49280 56118,49294 56118,49370 56118,49796 56270,49948
GND_422_2 on Top Layer "BOTTOM-No Net" (solid, remove dead copper, pour order 1003): 55414,49946 55738,49946 55970,49946 56022,49894 56028,49888 56028,49822 56028,49378 55800,49150 55768,49118 55536,49118 55266,49118 55230,49154 55192,49192 55192,49326 55192,49458 55280,49546 55326,49592 55326,49890 55326,49906 55358,49938 55366,49946 55410,49946
GND on Top Layer "BOTTOM-No Net" (solid, remove dead copper, pour order 1000): 50174,49950 58858,49950 58974,49834 58982,49826 58982,47428 58982,46356 58866,46240 58764,46138 58422,46138 50224,46138 50070,46292 50040,46322 50040,46408 50040,49880 50088,49928 50110,49950 50174,49950
GND_422_2 on Bottom Layer "BOTTOM-No Net" (solid, remove dead copper, pour order 1003): 55414,49946 55738,49946 55970,49946 56022,49894 56028,49888 56028,49822 56028,49378 55800,49150 55768,49118 55536,49118 55266,49118 55230,49154 55192,49192 55192,49326 55192,49458 55280,49546 55326,49592 55326,49890 55326,49906 55358,49938 55366,49946 55410,49946
GND_485 on Bottom Layer "BOTTOM-No Net" (solid, remove dead copper, pour order 1001): 57304,49968 58204,49968 58232,49940 58298,49874 58298,49808 58298,49676 58208,49586 58130,49508 57390,49508 57372,49508 57286,49594 57254,49626 57254,49692 57254,49918 57304,49968
GND_422_1 on Bottom Layer "BOTTOM-No Net" (solid, remove dead copper, pour order 1002): 56268,49950 56270,49948 56706,49948 56940,49948 57010,49878 57208,49680 57208,49348 57208,49196 57146,49134 57136,49124 56986,49124 56288,49124 56132,49280 56118,49294 56118,49370 56118,49796 56270,49948
GND on Bottom Layer "BOTTOM-No Net" (solid, remove dead copper, pour order 1004): 50174,49950 58858,49950 58974,49834 58982,49826 58982,47428 58982,46356 58866,46240 58764,46138 58422,46138 50224,46138 50070,46292 50040,46322 50040,46408 50040,49880 50088,49928 50110,49950 50174,49950

## Keep-outs
Keep-Out Layer:
  circle w3.94: c50156.37,49629 r22.63
  lines w1.97: 50006,46099 ccw(c50058.69,46119.82) 50041,46066 59022,46066 ccw(c58992.65,46128.31) 59054,46097 59054,49964 ccw(c59006.72,49949.3) 59020,49997 50040,49997 ccw(c50051.59,49952.23) 50006,49960 50006,46099

## Other copper
Top Layer:
  pour cut-out: 55950,49366 56220,49364 56222,49360 55946,49360
Bottom Layer:
  pour cut-out: 56104,49330 56108,49326 56108,49318 55990,49318 56002,49330
  pour cut-out: 57248,49660 57246,49658 57246,49650 57220,49650 57218,49652 57220,49654 57220,49660

## Silkscreen, mask and mechanical layers (free items; w line width, h text height)
Top Overlay:
  text "GND" at 53707,49947 h35.43 r270
  text "VCC" at 53987,49940 h35.43 r270
  text "D+" at 53807,49920 h35.43 r270
  text "D-" at 53888,49919 h35.43 r270
  text "1" at 57010,49806 h43.31
  text "+" at 54841,49756 h55.12 r270
  text "DIO" at 54938,49756 h55.12 r270
  text "CLK" at 55046,49756 h55.12 r270
  text "GND" at 55144,49756 h55.12 r270
  text "485" at 58542,49684 h80
  text "AGND" at 51129,49676 h43.31 r270
  text "+24V_IN" at 51279,49676 h43.31 r270
  text "485_BL" at 58438,49635.24 h30
  text "G" at 58172,49631.3 h30
  text "1" at 50883,49630 h43.31
  text "485_AH" at 58224,49630.24 h35
  text "AGND1" at 56294,49614 h43.31
  text "PC_TX-" at 56596,49614 h43.31
  text "PC_RX-" at 56900,49614 h43.31
  text "AGND2" at 55306,49600 h43.31
  text "PC_TX-" at 55608,49600 h43.31
  text "PC_RX-" at 55912,49600 h43.31
  text "1" at 50384,49546 h47.24 r270
  text "PC_TX+" at 56440,49542 h43.31
  text "PC_RX+" at 56774,49542 h43.31
  text "PC_TX+" at 55452,49528 h43.31
  text "PC_RX+" at 55786,49528 h43.31
  text "+24V" at 50373,49432 h47.24
  text "GND" at 53479,49421 h43.31
  text "GND" at 58582,49400 h43.31
  text "On_COM" at 50370,49334 h47.24
  text "EB-" at 58596.04,49306.25 h43.31
  text "On/Exp" at 50375,49232 h47.24
  text "+5V" at 52750,49212 h43.31
  text "EB+" at 58596.04,49212.5 h43.31
  text "_COM" at 50470,49128 h43.31
  text "OFF" at 50373,49127 h43.31
  text "EA-" at 58594.18,49118.75 h43.31
  text "OFF" at 50371,49030 h43.31
  text "EA+" at 58594.18,49025 h43.31
  text "GND" at 54383,48993 h43.31 r90
  text "1" at 58681,48969 h43.31 r90
  text "Foult_COM" at 50368,48935 h43.31
  text "TX" at 54381,48901 h43.31 r90
  text "+3.3V" at 53542,48896 h43.31
  text "Foult" at 50371,48833 h43.31
  text "RX" at 54381,48792 h43.31 r90
  text "Bell_COM" at 50364,48735 h43.31
  text "AGND" at 58529,48665 h43.31
  text "+12V" at 52724,48656 h43.31
  text "Bell" at 50374,48630 h43.31
  text "LCD_RX" at 58458,48566 h43.31
  text "EMC+" at 50373,48527 h43.31
  text "LCD_TX" at 58459,48466 h43.31
  text "EMC-" at 50371,48427 h43.31
  text "+12V" at 58543,48364 h43.31
  text "+5V" at 52978,48327 h43.31
  text "CAN1H" at 50376,48326 h43.31
  text "1" at 58669,48298 h43.31 r90
  text "CAN1L" at 50375,48225 h43.31
  text "AGND_M" at 58778,48214 h43.31
  text "Hand_Pre" at 50373,48133 h43.31
  text "+24V" at 52986,48115 h43.31
  text "AGND" at 50374,48029 h43.31
  text "AGND" at 50375,47928 h43.31
  text "1" at 58704,47822 h43.31 r90
  text "BRK_Power" at 58756,47776 h39.37 r90
  text "1" at 50372,47744 h43.31 r270
  text "EMC_C" at 50366,47650 h43.31
  text "AGND_M" at 58474,47606 h43.31
  text "EMC1" at 50366,47562 h43.31
  text "+24V_IN" at 58468.96,47476 h43.31
  text "1" at 58704,47398 h43.31 r90
  text "+24V_Out" at 50318,47006 h43.31
  text "AGND" at 50352,46928 h43.31
  text "1" at 50396,46815 h43.31 r270
  text "+24V_Out" at 50324,46706 h43.31
  text "AGND" at 50377,46615 h43.31
  text "1" at 58686,46510 h43.31 r90
  text "FPD_Top" at 56805,46502 h39.37
  text "Tube_Bott" at 56272,46500 h39.37
  text "FPD_BOTT" at 57307,46498 h39.37
  text "CAN1H" at 50534,46495 h43.31
  text "Origin" at 55171,46492 h39.37
  text "Tube_Top" at 55721,46491 h39.37
  text "SF1-" at 57875,46491 h39.37
  text "SF2-" at 58078,46490 h39.37
  text "AGND" at 54128,46472 h39.37
  text "1" at 50958,46470 h43.31
  text "AGND" at 52568,46470 h39.37
  text "AGND" at 53282,46470 h39.37
  text "AGND" at 53685,46470 h39.37
  text "AGND" at 51938,46469 h39.37
  text "RadOut" at 51485,46467 h43.31
  text "FloOut" at 51725,46467 h43.31
  text "Fault" at 52349,46467 h39.37
  text "PRE" at 52768,46466 h39.37
  text "CAN2H" at 51057,46464 h43.31
  text "Fan" at 58402,46450 h39.37
  text "1" at 51418,46428 h43.31
  text "1" at 53556,46428 h43.31
  text "1" at 52223,46427 h43.31
  text "1" at 53131,46427 h43.31
  text "1" at 50415,46425 h43.31
  text "1" at 53967,46422 h43.31
  text "1" at 54881,46422 h43.31
  text "1" at 55356,46422 h43.31
  text "1" at 56717,46422 h43.31
  text "1" at 57221,46422 h43.31
  text "1" at 57747,46422 h43.31
  text "AGND" at 50670,46419 h43.31
  text "1" at 56193,46418 h43.31
  text "AGND" at 56946,46418 h43.31
  text "AGND" at 55887,46417 h43.31
  text "CAN1L" at 50455,46416 h43.31
  text "+24V" at 55084,46416 h43.31
  text "+24V" at 56748,46416 h43.31
  text "Laser" at 53589,46415 h39.37
  text "AGND" at 55273,46415 h43.31
  text "AGND" at 51169,46414 h39.37
  text "Laser" at 53174,46414 h39.37
  text "+24V" at 55688,46414 h43.31
  text "AGND" at 56457,46414 h43.31
  text "ExPose" at 52634,46413 h39.37
  text "Laser" at 54000,46413 h39.37
  text "READY" at 52428,46412 h39.37
  text "+24V" at 52866,46412 h39.37
  text "1" at 55655,46412 h43.31
  text "SF1+" at 57784,46412 h39.37
  text "Fan" at 58336,46412 h39.37
  text "KV85" at 52251,46411 h39.37
  text "AGND" at 57444,46411 h43.31
  text "SF2+" at 57978,46411 h39.37
  text "+24V" at 57256,46410 h43.31
  text "CAN2L" at 50948,46409 h43.31
  text "FloSY" at 51846,46409 h43.31
  text "+24V" at 56246,46409 h43.31
  text "AGND_M" at 58466,46408 h39.37
  text "RADSY" at 51621,46407 h43.31
  text "VCC" at 51457,46404 h43.31
Bottom Overlay:
  text "GND" at 53734,49944 h31.5 r90
  text "VCC" at 54008,49942 h31.5 r90
  text "D+" at 53833,49920 h31.5 r90
  text "D-" at 53909,49919 h31.5 r90